# Altium PCB OK6010_DB.PcbDoc (part 1 of 4)
Units mil, origin at the board's own origin, x right, y up, seen from the top; angles counter-clockwise.
Board outline 4000 x 5500 mil, 4 copper layers (Top Layer, Ground Plane, Power Plane, Bottom Layer), stack 34.2 mil thick; 268 components, 248 nets, 1028 pads, 599 vias.
Unrouted connection lines stored in the file: 10.
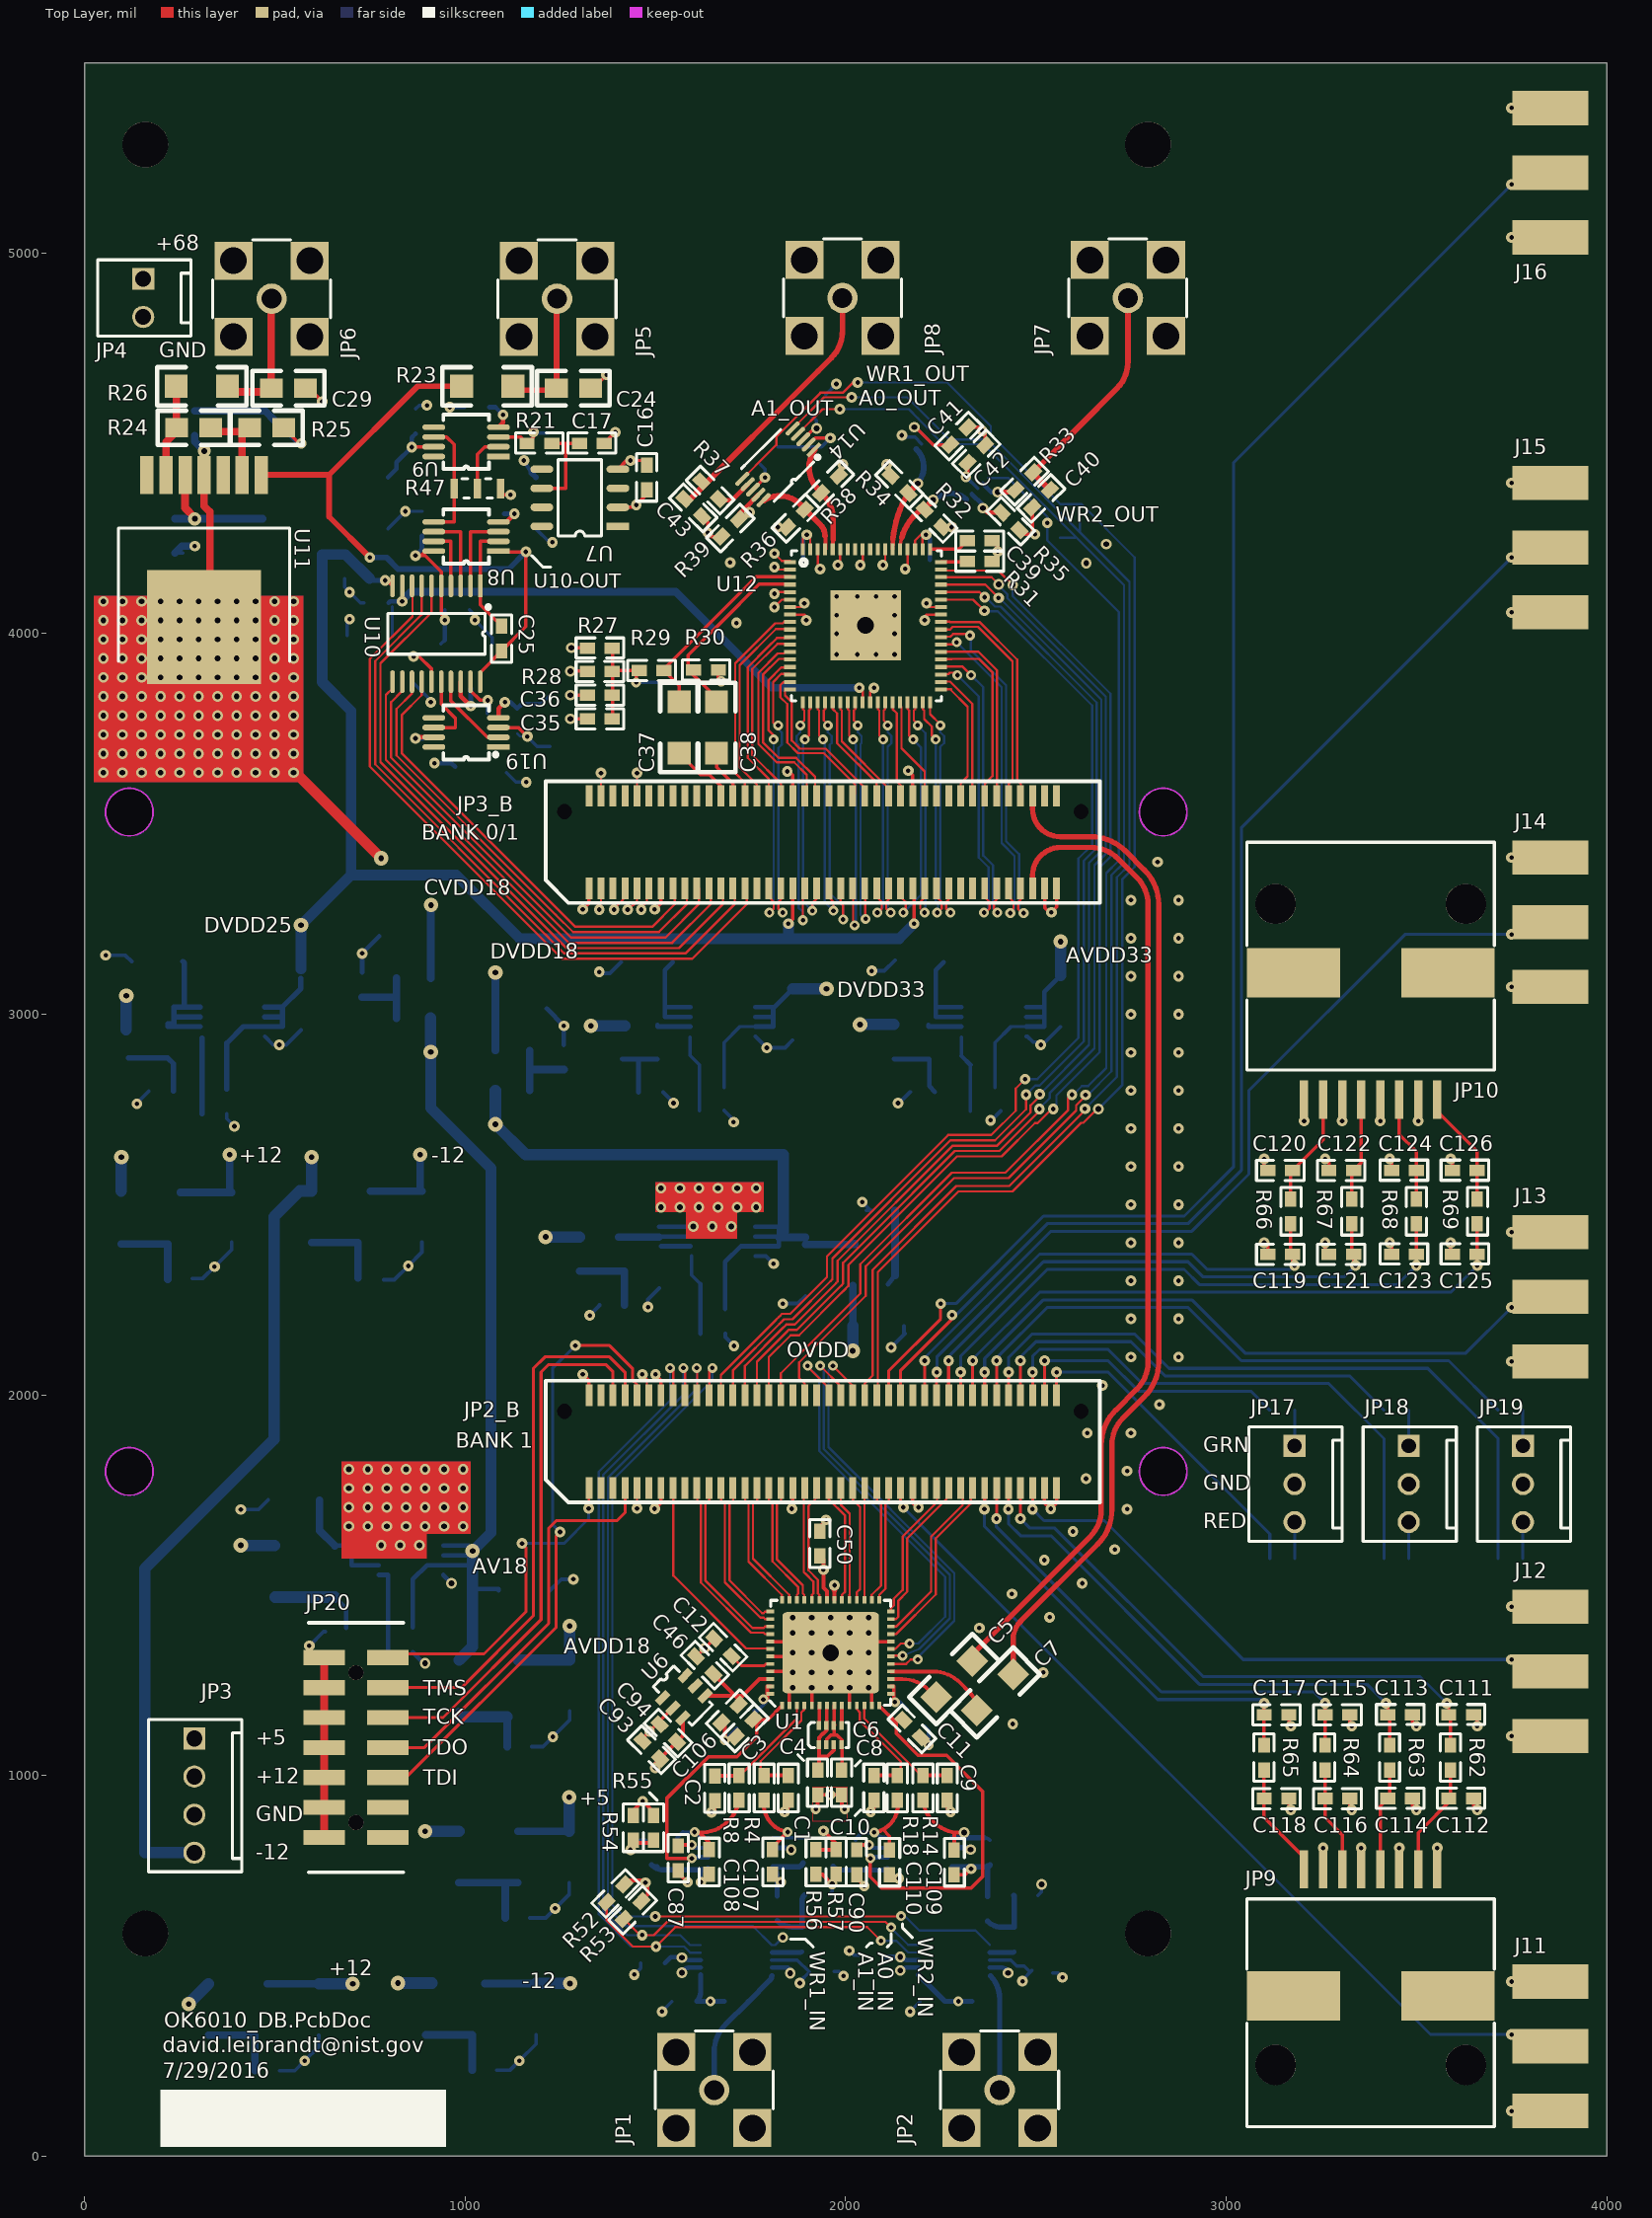
[diagram p0: Top Layer view]
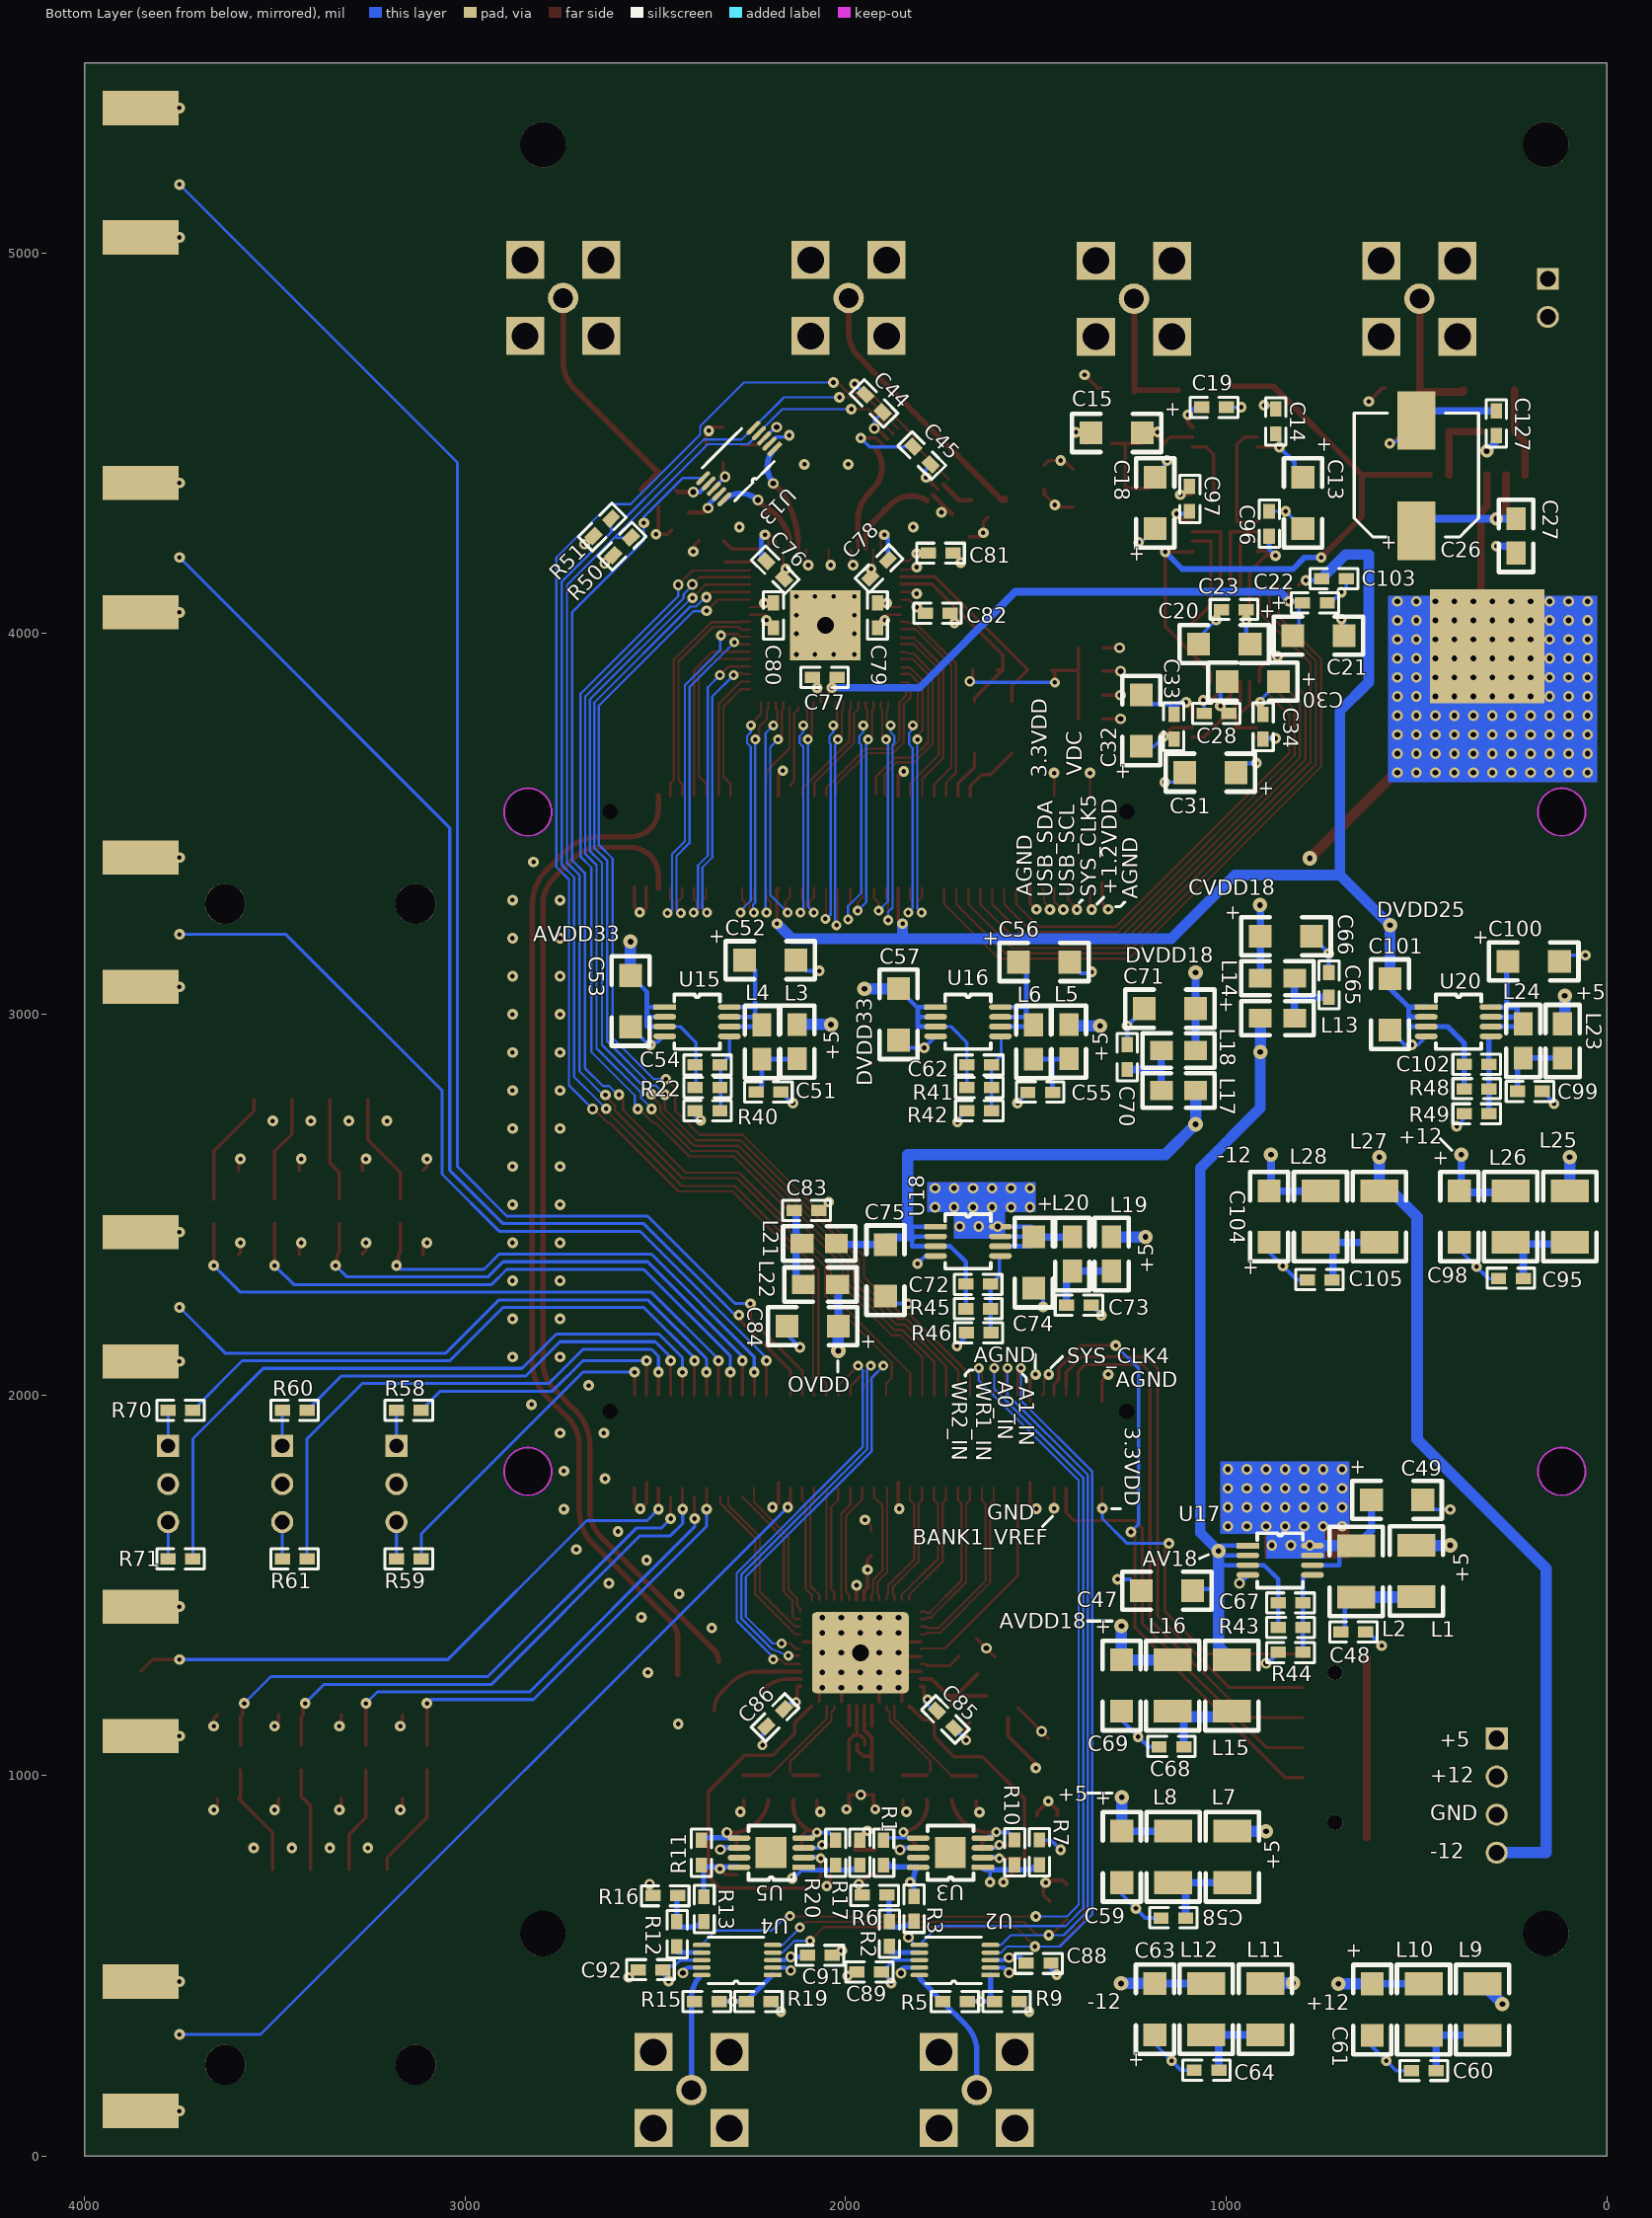
[diagram p1: Bottom Layer view, seen from below]
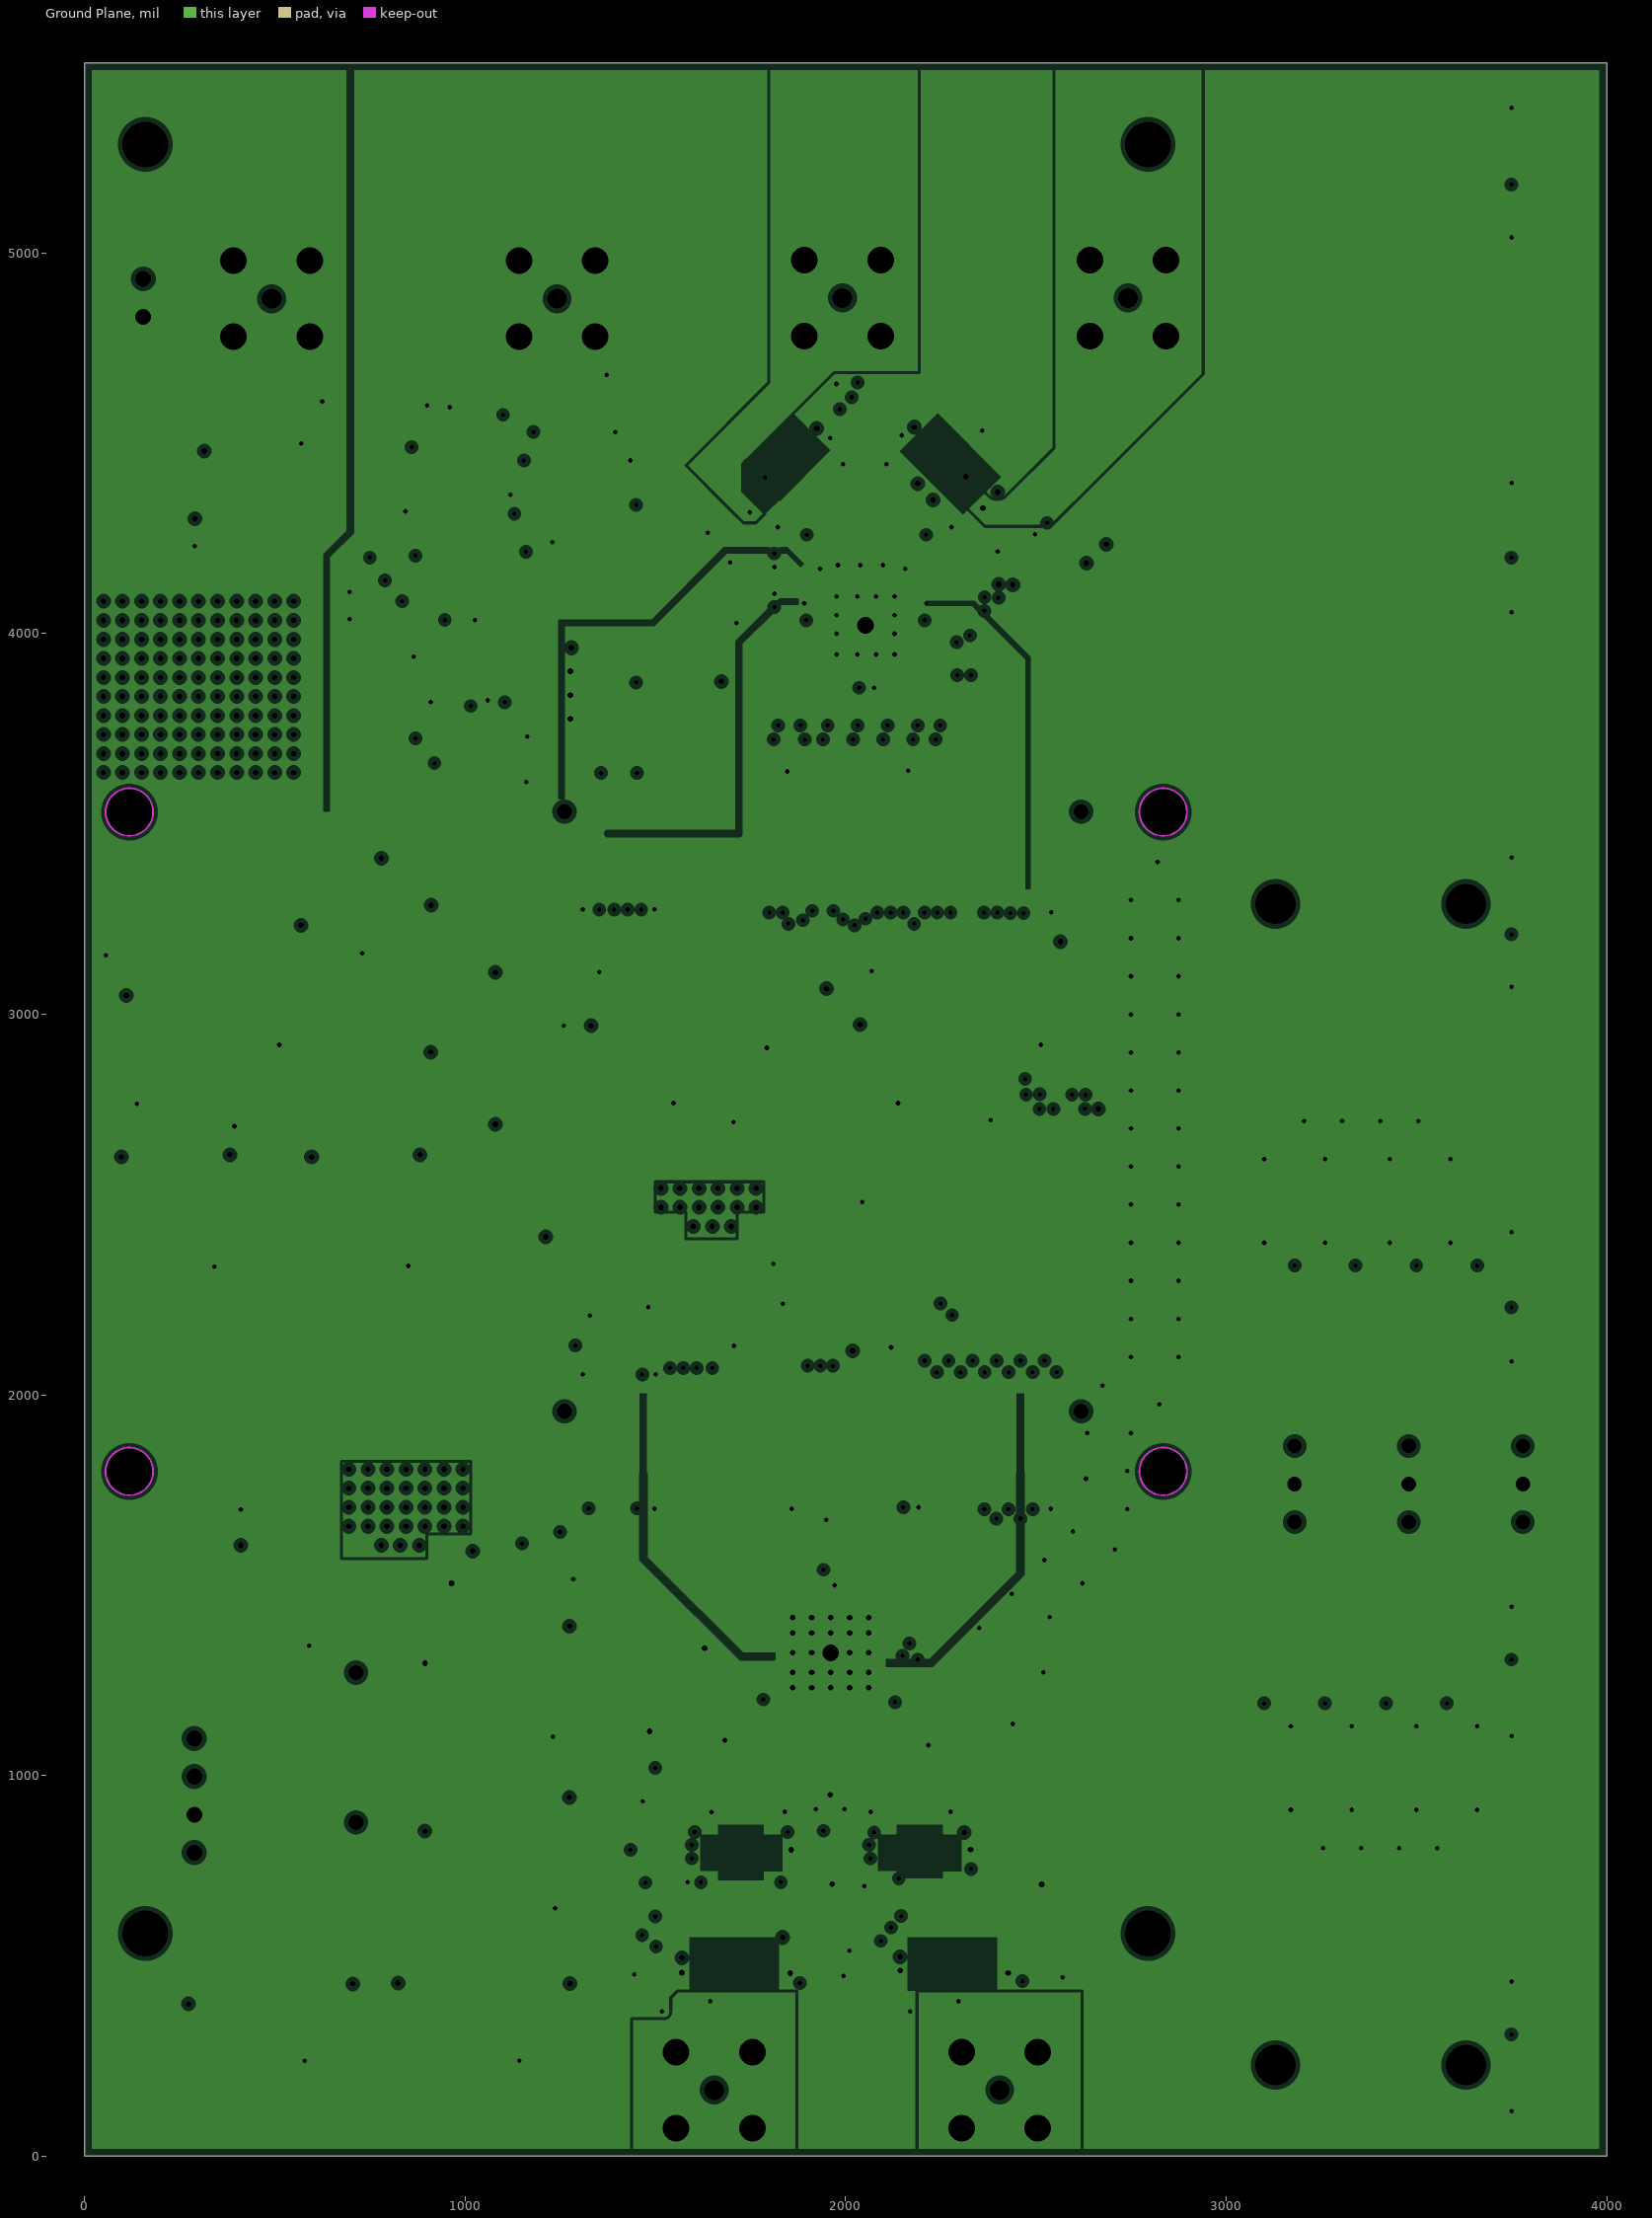
[diagram p2: Ground Plane, clearances drawn from the general rule]
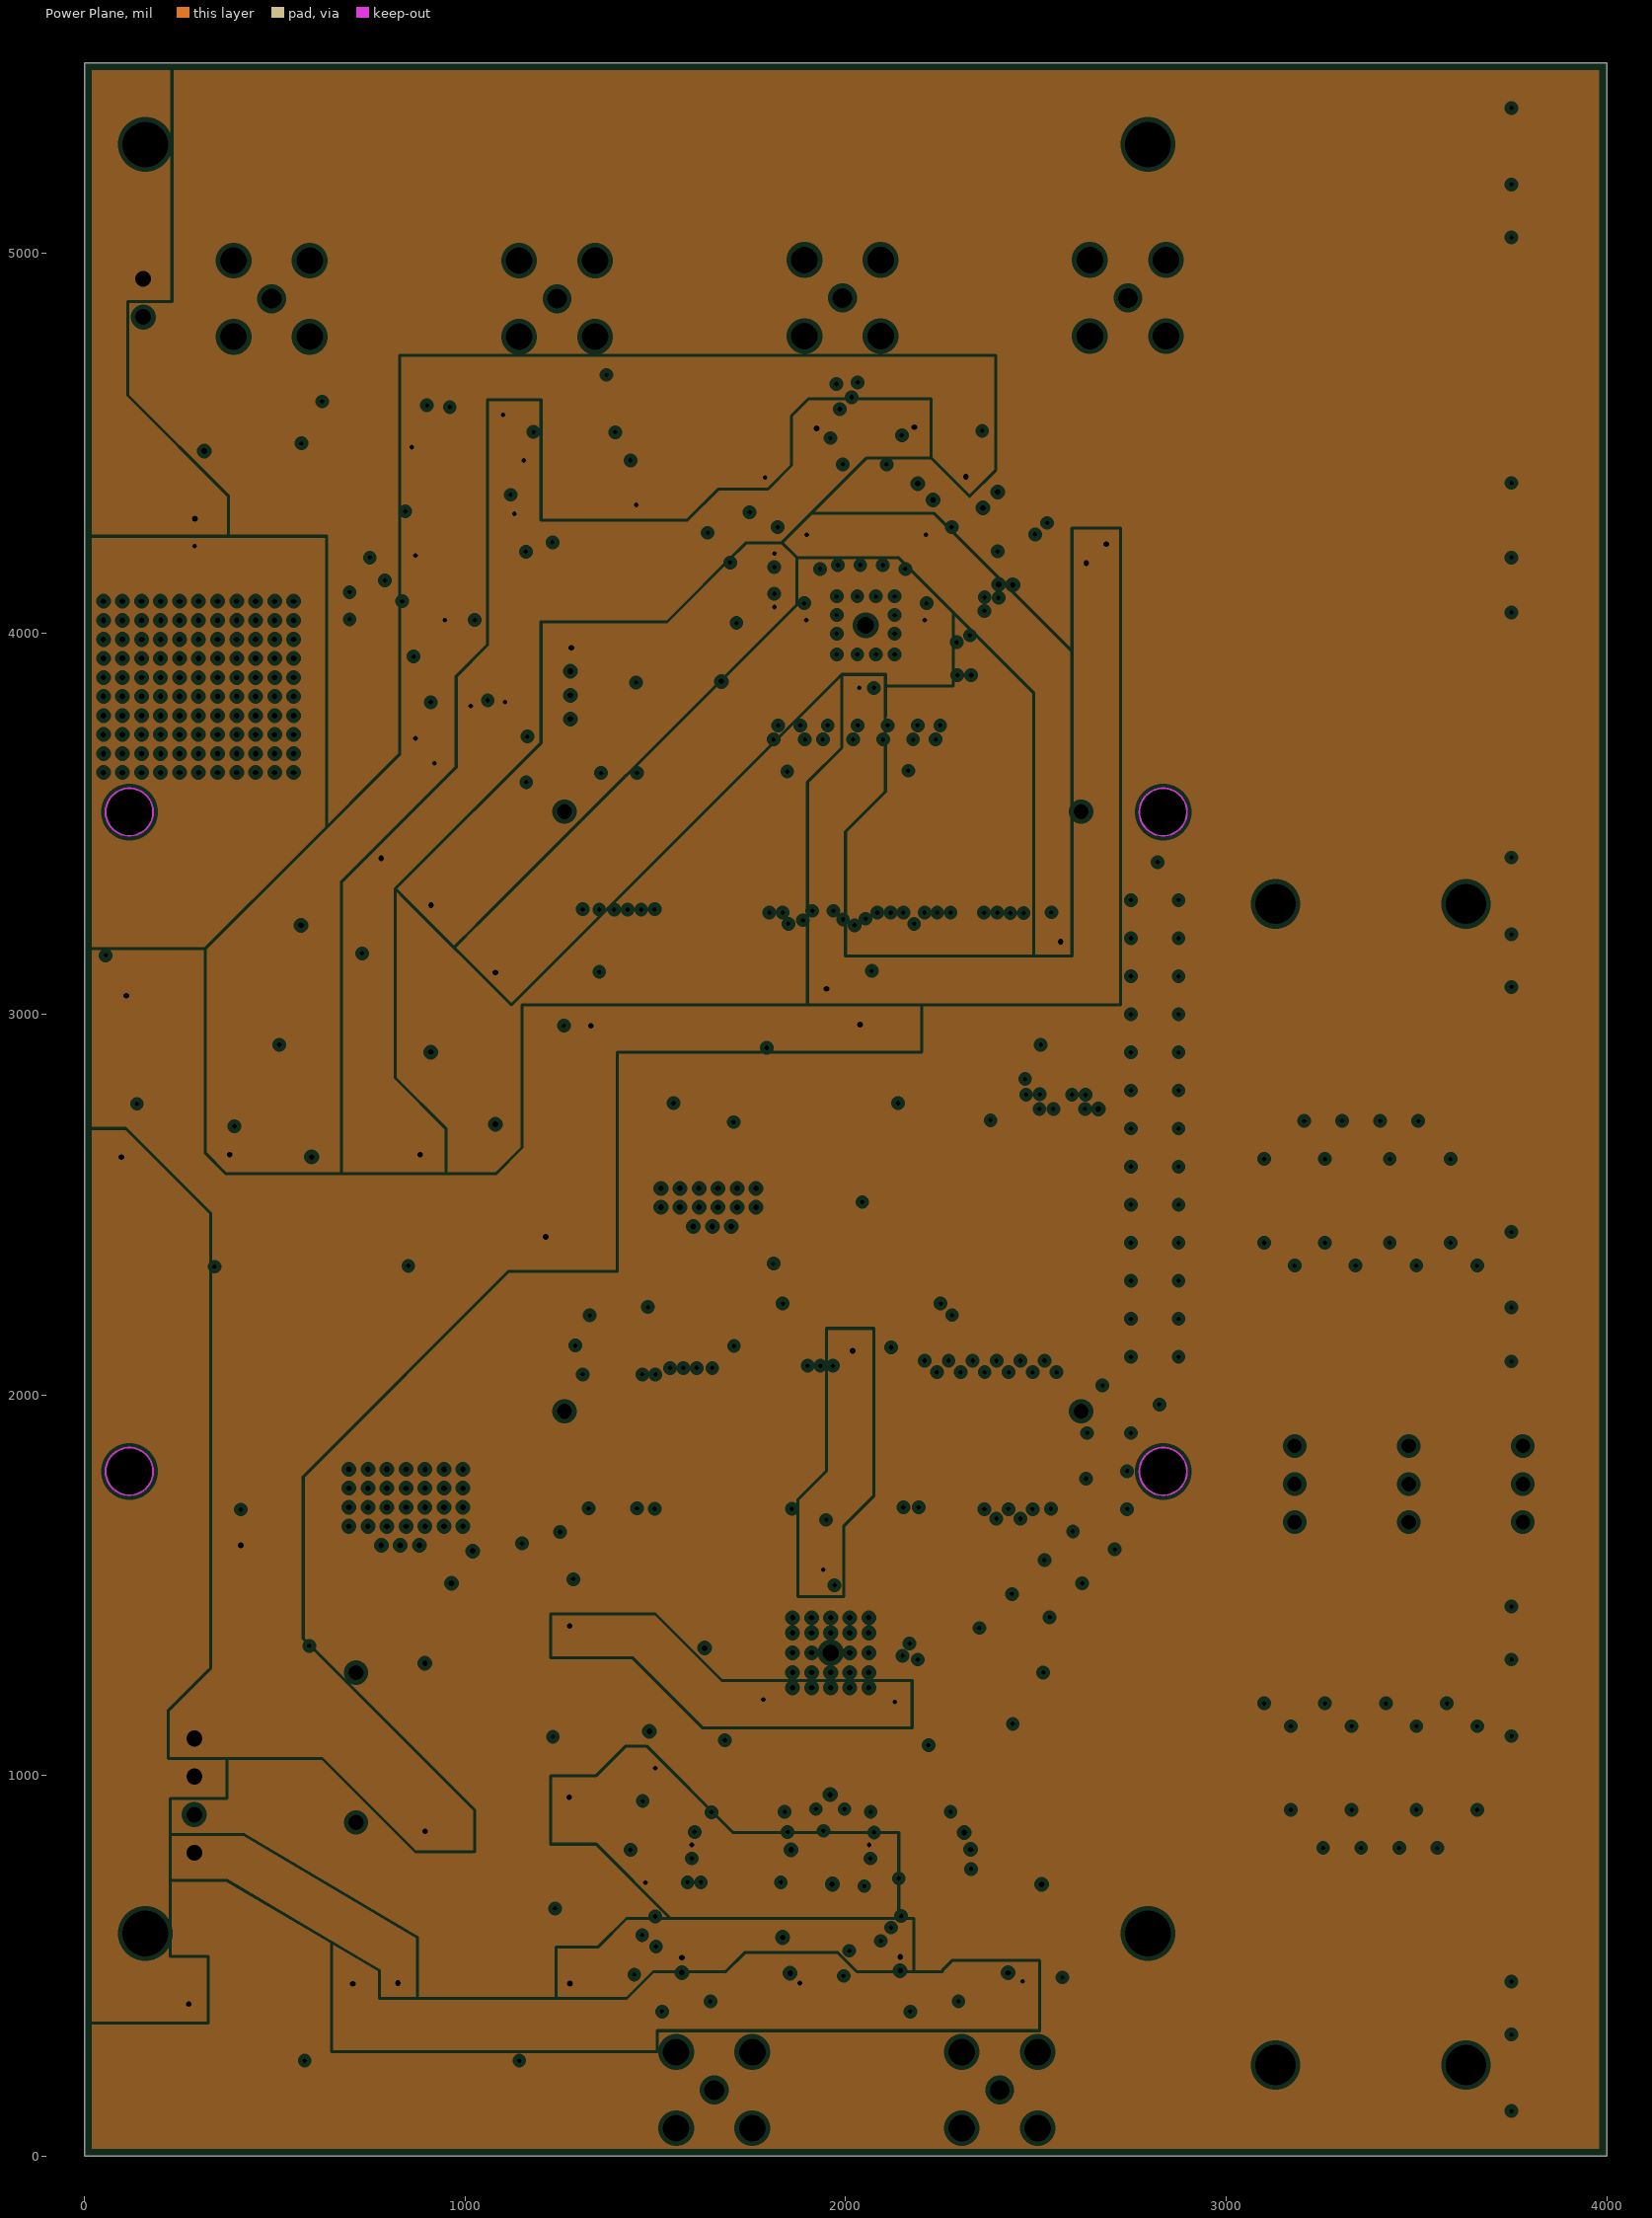
[diagram p3: Power Plane, clearances drawn from the general rule]

## Layer stack, top to bottom
Top Solder: solder mask 0.4, Solder Resist, Dk 3.5
Top Layer: signal copper 1.4
Dielectric1: core 8, FR-4, Dk 4.8
Ground Plane: plane copper 1.4
Dielectric2: prepreg 12.6, FR-4, Dk 4.8
Power Plane: plane copper 1.4
Dielectric3: core 8, FR-4, Dk 4.8
Bottom Layer: signal copper 1.4
Bottom Solder: solder mask 0.4, Solder Resist, Dk 3.5

## Board outline
0,0 4000,0 4000,5500 0,5500

## Design rules (kind name [scope] priority, off if disabled: settings)
Clearance Clearance_2 [InPolygon] p1: gap=16
Clearance [OnLayer('Ground Layer') vs OnLayer('Ground Layer')] p2: gap=16
Clearance Clearance_1 [All] p3: gap=6
DiffPairsRouting [All] p1: maxlimit=10 minlimit=6 mostfreqgap=6 toplayer_minwidth=15 toplayer_maxwidth=15 toplayer_prefwidth=15 bottomlayer_minwidth=15 bottomlayer_maxwidth=15 bottomlayer_prefwidth=15 maxuncoupledlength=500
HoleSize [All] p1: absolutevalues=TRUE maxlimit=250 minlimit=1 maxpercent=80.000 minpercent=20.000
MinimumSolderMaskSliver [All] p1: minsoldermaskwidth=0
PlaneClearance [All] p1: clearance=12
PlaneConnect [All] p1: planeconnectstyle=Direct reliefexpansion=14 reliefentries=4 reliefconductorwidth=10 reliefairgap=10
PolygonConnect PolygonConnect_2 [InNet('AGND')] p1: connectstyle=Direct reliefconductorwidth=10 reliefentries=4 polygonreliefangle="90 Angle" airgapwidth=10
PolygonConnect [OnLayer('Ground Layer') vs OnLayer('Ground Layer')] p2: connectstyle=Direct reliefconductorwidth=10 reliefentries=4 polygonreliefangle="90 Angle" airgapwidth=10
PolygonConnect PolygonConnect_1 [All] p3: connectstyle=Relief reliefconductorwidth=10 reliefentries=4 polygonreliefangle="90 Angle" airgapwidth=10
RoutingVias [All] p1: holewidth=12 width=28 viastyle="Through Hole" minholewidth=12 minwidth=28 maxholewidth=28 maxwidth=50
SilkToSilkClearance [All] p1: silktosilkclearance=0
SilkToSolderMaskClearance SilkscreenOverComponentPads [IsPad] p1: minsilkscreentomaskgap=1 clearancetoexposedcopper=TRUE
SolderMaskExpansion [All] p1: expansion=2
Width [All] p1: maxlimit=120 minlimit=6 preferedwidth=10 minimp=50.000000 maximp=50.000000 favimp=50.000000
23 further rules are at their usual default settings.

## Classes and differential pairs
component class OK6010_DB: C111 C112 C113 C114 C115 C116 C117 C118 C119 C120 C121 C122 C123 C124 C125 C126 J11 J12 J13 J14 J15 J16 JP2_B JP3_B JP9 JP10 JP17 JP18 JP19 JP20 R58 R59 R60 R61 R62 R63 R64 R65 R66 R67 R68 R69 R70 R71
component class OK6010_DB_PWR: C47 C48 C49 C51 C52 C53 C54 C55 C56 C57 C58 C59 C60 C61 C62 C63 C64 C65 C66 C67 C68 C69 C70 C71 C72 C73 C74 C75 C83 C84 C95 C98 C99 C100 C101 C102 C104 C105 JP3 JP4 L1 L2 L3 L4 L5 L6 L7 L8 L9 L10 L11 L12 L13 L14 L15 L16 L17 L18 L19 L20 L21 L22 L23 L24 L25 L26 L27 L28 R22 R40 R41 R42 R43 R44 R45 R46 R48 R49 U15 U16 U17 U18 U20
component class OK6010_DB_DAC_s: C13 C14 C15 C16 C17 C18 C19 C20 C21 C22 C23 C24 C25 C26 C27 C28 C29 C30 C31 C32 C33 C34 C96 C97 C103 C127 JP5 JP6 R21 R23 R24 R25 R26 R47 U7 U8 U9 U10 U11 U19
component class OK6010_DB_ADC: C1 C2 C3 C4 C5 C6 C7 C8 C9 C10 C11 C12 C46 C50 C85 C86 C87 C88 C89 C90 C91 C92 C93 C94 C106 C107 C108 C109 C110 JP1 JP2 R1 R2 R3 R4 R5 R6 R7 R8 R9 R10 R11 R12 R13 R14 R15 R16 R17 R18 R19 R20 R52 R53 R54 R55 R56 R57 U1 U2 U3 U4 U5 U6
component class OK6010_DB_DAC_f: C35 C36 C37 C38 C39 C40 C41 C42 C43 C44 C45 C76 C77 C78 C79 C80 C81 C82 JP7 JP8 R27 R28 R29 R30 R31 R32 R33 R34 R35 R36 R37 R38 R39 R50 R51 U12 U13 U14
differential pair L38_0: +L38_0_P -L38_0_N
differential pair A2: +A2_P -A2_N
differential pair A1: +A1_P -A1_N
differential pair L49_1: +L49_1_P -L49_1_N
differential pair L62_0: +L62_0_P -L62_0_N
differential pair L36_0: +L36_0_P -L36_0_N
differential pair L8_0: +L8_0_P -L8_0_N
differential pair L66_0: +L66_0_P -L66_0_N
differential pair L65_0: +L65_0_P -L65_0_N
differential pair L64_0: +L64_0_P -L64_0_N
differential pair L63_0: +L63_0_P -L63_0_N
differential pair L60_1: +L60_1_P -L60_1_N
differential pair L58_1: +L58_1_P -L58_1_N
differential pair L51_1: +L51_1_P -L51_1_N
differential pair L51_0: +L51_0_P -L51_0_N
differential pair L50_0: +L50_0_P -L50_0_N
differential pair L49_0: +L49_0_P -L49_0_N
differential pair L47_1: +L47_1_P -L47_1_N
differential pair L44_1: +L44_1_P -L44_1_N
differential pair L39_1: +L39_1_P -L39_1_N
differential pair L38_1: +L38_1_P -L38_1_N
differential pair L33_0: +L33_0_P -L33_0_N
differential pair L32_0: +L32_0_P -L32_0_N
differential pair L30_1: +L30_1_P -L30_1_N
differential pair L29_1: +L29_1_P -L29_1_N
differential pair L7_0: +L7_0_P -L7_0_N
differential pair L6_0: +L6_0_P -L6_0_N
differential pair L5_0: +L5_0_P -L5_0_N
differential pair L4_0: +L4_0_P -L4_0_N
differential pair L3_0: +L3_0_P -L3_0_N
differential pair L2_0: +L2_0_P -L2_0_N
differential pair L60A_1: +L60A_1_P -L60A_1_N
differential pair L40_1: +L40_1_P -L40_1_N
differential pair L1_0: +L1_0_P -L1_0_N

## Components (designator, comment, footprint, x,y, rotation, side; value= is the part's Value field where it differs from the comment)
C1 "300pF" 0603w 1849,935 r90 top
C2 "300pF" 0603w 1657,999 r270 top
C3 "0.1uF" 0603w 1758,1148 r225 top
C4 "0.1uF" 0603w 1927,1014 r270 top
C5 "0.1uF" 1206 2238,1206 r45 top
C6 "2.2uF" "0805 CLL" 1930,1081 r90 top locked
C7 "0.1uF" 1206 2345,1171 r45 top
C8 "0.1uF" 0603w 1990,1014 r270 top
C9 "300pF" 0603w 2267,935 r90 top
C10 "300pF" 0603w 2075,1000 r270 top
C11 "0.1uF" 0603w 2152,1146 r315 top
C12 "2.2uF" 0603w 1701,1314 r135 top
C13 "10uF" 1206 798,4411 r270 bottom
C14 "0.1uF" 0603w 870,4525 r90 bottom
C15 "10uF" 1206 1219.87,4527.21 r0 bottom
C16 "0.1uF" 0603w 1478,4443 r270 top
C17 "0.1uF" 0603w 1366,4500.31 r180 top
C18 "10uF" 1206 1186,4276 r90 bottom
C19 "0.1uF" 0603w 1064,4595 r180 bottom
C20 "10uF" 1206 937,3973 r0 bottom
C21 "10uF" 1206 825,3995 r180 bottom
C22 "0.1uF" 0603w 799,4081 r180 bottom
C23 "0.1uF" 0603w 947,4063 r0 bottom
C24 "33nF" 0805 1330,4645 r180 top
C25 "10pF" 0603w 1096.12,3954.55 r90 top
C26 "10uF" "7243 V TYPE HD" 500,4270 r90 bottom
C27 "0.1uF" 0805 238,4302 r270 bottom
C28 "0.1uF" 0603w 993,3790 r0 bottom
C29 "33nF" 0805 581,4645 r180 top
C30 "10uF" 1206 862,3874 r0 bottom
C31 "10uF" 1206 974,3635 r0 bottom
C32 "10uF" 1206 1223,3704 r90 bottom
C33 "0.1uF" 0603w 1137,3788 r270 bottom
C34 "0.1uF" 0603w 903,3723 r90 bottom
C35 "0.1uF" 0603w 1387,3776 r180 top
C36 "1nF" 0603w 1387,3838 r180 top
C37 "0.1uF" 1206 1563,3686 r90 top
C38 "0.1uF" 1206 1661,3686 r90 top
C39 "0.1uF" 0603w 2320,4244 r0 top
C40 "300pF" 0603w 2537,4378 r225 top
C41 "0.1uF" 0603w 2321,4542 r225 top
C42 "0.1uF" 0603w 2367,4495 r225 top
C43 "300pF" 0603w 1577,4354 r315 top
C44 "0.1uF" 0603w 1948,4628 r225 bottom
C45 "0.1uF" 0603w 1822,4491 r225 bottom
C46 "10uF" 0603w 1653,1267 r135 top
C47 "100uF" 1206 1088,1486 r0 bottom
C48 "0.1uF" 0603w 698,1378 r180 bottom
C49 "10uF" 1206 618,1724 r180 bottom
C50 "0.1uF" 0603w 1933,1642 r270 top
C51 "0.1uF" 0603w 2235,2796.2 r180 bottom
C52 "10uF" 1206 2265,3142.2 r180 bottom
C53 "100uF" 1206 2565,3102.2 r270 bottom
C54 "100pF" 0603w 2395,2867.2 r180 bottom
C55 "0.1uF" 0603w 1456,2795.2 r0 bottom
C56 "10uF" 1206 1546,3137.2 r180 bottom
C57 "100uF" 1206 1861,3067.2 r270 bottom
C58 "0.1uF" 0603w 1106,626 r0 bottom
C59 "10uF" 1206 1274,854 r270 bottom
C60 "0.1uF" 0603w 448,225 r0 bottom
C61 "10uF" 1206 616,453 r270 bottom
C62 "100pF" 0603w 1681,2867.2 r180 bottom
C63 "10uF" 1206 1187,319 r90 bottom
C64 "0.1uF" 0603w 1019,226 r0 bottom
C65 "0.1uF" 0603w 730,3045 r90 bottom
C66 "10uF" 1206 910,3205 r180 bottom
C67 "100pF" 0603w 863,1454 r180 bottom
C68 "0.1uF" 0603w 1111,1076 r0 bottom
C69 "10uF" 1206 1275,1304 r270 bottom
C70 "0.1uF" 0603w 1260,2855 r90 bottom
C71 "10uF" 1206 1080,3015 r0 bottom
C72 "100pF" 0603w 1684,2291.2 r180 bottom
C73 "0.1uF" 0603w 1419,2236.2 r180 bottom
C74 "10uF" 1206 1505,2415.2 r270 bottom
C75 "100uF" 1206 1895,2395.2 r270 bottom
C76 "0.1uF" 0603w 2161.9,4144.49 r45 bottom
C77 "0.1uF" 0603w 2022.49,3885.1 r0 bottom
C78 "0.1uF" 0603w 1888.51,4193.9 r315 bottom
C79 "0.1uF" 0603w 1915.9,4080.51 r270 bottom
C80 "0.1uF" 0603w 2189.1,4080.51 r270 bottom
C81 "1nF" 0603w 1782.51,4211.9 r180 bottom
C82 "1nF" 0603w 1790.51,4053.9 r180 bottom
C83 "0.1uF" 0603w 2135,2485 r180 bottom
C84 "10uF" 1206 2019,2181 r0 bottom
C85 "0.1uF" 0603w 1759.93,1170.73 r225 bottom
C86 "0.1uF" 0603w 2161.73,1175.07 r315 bottom
C87 "0.1uF" 0603w 1560.54,815.56 r270 top
C88 "0.1uF" 0603w 1525.07,507.27 r180 bottom
C89 "0.1uF" 0603w 1904.93,483.73 r0 bottom
C90 "0.1uF" 0603w 2029.27,805.07 r270 top
C91 "0.1uF" 0603w 2100.07,528.27 r180 bottom
C92 "0.1uF" 0603w 2479.93,489.73 r0 bottom
C93 "10uF" 0603w 1512.73,1044.93 r135 top
C94 "0.1uF" 0603w 1511.27,1135.07 r315 top
C95 "0.1uF" 0603w 219,2306.1 r0 bottom
C96 "0.1uF" 0603w 886.9,4256.49 r90 bottom
C97 "0.1uF" 0603w 1095.9,4321.49 r90 bottom
C98 "10uF" 1206 387,2536.1 r270 bottom
C99 "0.1uF" 0603w 234,2798 r180 bottom
C100 "10uF" 1206 259,3139 r180 bottom
C101 "100uF" 1206 569,3094 r270 bottom
C102 "100pF" 0603w 374,2869 r180 bottom
C103 "0.1uF" 0603w 749,4145 r180 bottom
C104 "10uF" 1206 887,2401.1 r90 bottom
C105 "0.1uF" 0603w 722,2302.49 r0 bottom
C106 "0.1uF" 0603w 1673.49,1139.9 r45 top
C107 "1.8pF" 0603w 1808.49,740.49 r90 top
C108 "1.8pF" 0603w 1641.49,740.49 r90 top
C109 "1.8pF" 0603w 2285.49,739.9 r90 top
C110 "1.8pF" 0603w 2115.49,739.9 r90 top
C111 "NS" 0603w 3650,1160 r180 top
C112 "NS" 0603w 3650,940 r180 top
C113 "NS" 0603w 3490,1160 r180 top
C114 "NS" 0603w 3490,940 r180 top
C115 "NS" 0603w 3260,1160 r0 top
C116 "NS" 0603w 3260,940 r0 top
C117 "NS" 0603w 3100,1160 r0 top
C118 "NS" 0603w 3100,940 r0 top
C119 "NS" 0603w 3110,2370 r0 top
C120 "NS" 0603w 3110,2590 r0 top
C121 "NS" 0603w 3270,2370 r0 top
C122 "NS" 0603w 3270,2590 r0 top
C123 "NS" 0603w 3500,2370 r180 top
C124 "NS" 0603w 3500,2590 r180 top
C125 "NS" 0603w 3660,2370 r180 top
C126 "NS" 0603w 3660,2590 r180 top
C127 "0.1uF" 0603w 290,4520 r90 bottom
J11 "SMA_EDGE" sma_edge 3852,289 r0 top
J12 "SMA_EDGE" sma_edge 3852,1274 r0 top
J13 "SMA_EDGE" sma_edge 3852,2258 r0 top
J14 "SMA_EDGE" sma_edge 3852,3242 r0 top
J15 "SMA_EDGE" sma_edge 3852,4226 r0 top
J16 "SMA_EDGE" sma_edge 3852,5211 r0 top
JP1 "SMA" sma_pcb_200 1555,74 r90 top
JP2 "SMA" sma_pcb_200 2305,74 r90 top
JP2_B "BTE-040-01-F-D-A" BTE-040-01-F-D-A 1326,1999 r0 top locked
JP3 "SIP4 (PCB TERMINAL)" SIP4MOLEX 288.9,1097.51 r270 top
JP3_B "BTE-040-01-F-D-A" BTE-040-01-F-D-A 1326,3574 r0 top locked
JP4 "SIP2 (PCB TERMINAL)" SIP2MOLEX 154.51,4932.1 r270 top
JP5 "SMA" sma_pcb_200 1142,4780 r90 top
JP6 "SMA" sma_pcb_200 392,4780 r90 top
JP7 "SMA" sma_pcb_200 2642,4782 r90 top
JP8 "SMA" sma_pcb_200 1892,4782 r90 top
JP9 "RJ-45" SMD_ETHERNET 3630,240 r270 top
JP10 "RJ-45" SMD_ETHERNET 3130,3290 r90 top
JP17 "SIP3 (PCB TERMINAL)" SIP3MOLEX 3180,1866 r270 top
JP18 "SIP3 (PCB TERMINAL)" SIP3MOLEX 3480,1866 r270 top
JP19 "SIP3 (PCB TERMINAL)" SIP3MOLEX 3780,1866 r270 top
JP20 "HEADER 7X2" "IDC14 SM 2MM" 630,1310 r0 top
L1 "1.0uH" 1210 500,1605 r270 bottom
L2 "1.0uH" 1210 658,1469 r90 bottom
L3 "1.0uH" 0805 2127,2973.2 r270 bottom
L4 "1.0uH" 0805 2220,2882.2 r90 bottom
L5 "1.0uH" 0805 1413,2973.2 r270 bottom
L6 "1.0uH" 0805 1506,2882.2 r90 bottom
L7 "1.0uH" 1210 984,854 r270 bottom
L8 "1.0uH" 1210 1139,719 r90 bottom
L9 "1.0uH" 1210 326,453 r270 bottom
L10 "1.0uH" 1210 481,318 r90 bottom
L11 "1.0uH" 1210 897,454 r270 bottom
L12 "1.0uH" 1210 1052,319 r90 bottom
L13 "1.0uH" 0805 910,2990 r180 bottom
L14 "1.0uH" 0805 820,3095 r0 bottom
L15 "1.0uH" 1210 985,1304 r270 bottom
L16 "1.0uH" 1210 1140,1169 r90 bottom
L17 "1.0uH" 0805 1080,2800 r0 bottom
L18 "1.0uH" 0805 1170,2905 r180 bottom
L19 "1.0uH" 0805 1301,2415.2 r270 bottom
L20 "1.0uH" 0805 1404,2325.2 r90 bottom
L21 "1.0uH" 0805 2024,2398 r0 bottom
L22 "1.0uH" 0805 2111,2290 r180 bottom
L23 "1.0uH" 0805 116,2975 r270 bottom
L24 "1.0uH" 0805 219,2885 r90 bottom
L25 "1.0uH" 1210 97,2536.1 r270 bottom
L26 "1.0uH" 1210 252,2401.1 r90 bottom
L27 "1.0uH" 1210 597,2536.1 r270 bottom
L28 "1.0uH" 1210 752,2401.1 r90 bottom
R1 "249*" 0603w 1900,765 r90 bottom
R2 "150*" 0603w 1885,552 r90 bottom
R3 "220*" 0603w 1820,618 r90 bottom
R4 "49.9*" 0603w 1786,935 r90 top
R5 "100k" 0603w 1680,406 r0 bottom
R6 "49.9*" 0603w 1956,686 r180 bottom
R7 "220*" 0603w 1490,831 r270 bottom
R8 "49.9*" 0603w 1720,935 r90 top
R9 "1M" 0603w 1544,406 r0 bottom
R10 "249*" 0603w 1556,766 r90 bottom
R11 "249*" 0603w 2379,765 r90 bottom
R12 "150*" 0603w 2443,551 r90 bottom
R13 "220*" 0603w 2372,617 r90 bottom
R14 "49.9*" 0603w 2203,935 r90 top
R15 "100k" 0603w 2332,406 r0 bottom
R16 "49.9*" 0603w 2506,685 r180 bottom
R17 "220*" 0603w 1962,830 r270 bottom
R18 "49.9*" 0603w 2136,935 r90 top
R19 "1M" 0603w 2196,406 r0 bottom
R20 "249*" 0603w 2026,765 r90 bottom
R21 "1.5k" 0603w 1228.02,4500.31 r180 top
R22 "140k" 0603w 2330,2807.2 r0 bottom
R23 "49.9*" 1206 991,4650 r0 top
R24 "9k *" 0805 332,4541 r180 top
R25 "1k *" 0805 524,4541 r180 top
R26 "49.9*" 1206 241,4650 r0 top
R27 "1K" 0603w 1387,3962 r180 top
R28 "287" 0603w 1322,3901 r0 top
R29 "49.9*" 0603w 1523,3903 r180 top
R30 "49.9*" 0603w 1601,3905 r0 top
R31 "10k*" 0603w 2385,4190 r180 top
R32 "49.9*" 0603w 2208,4326 r315 top
R33 "49.9*" 0603w 2447,4378 r45 top
R34 "49.9*" 0603w 2119,4415 r315 top
R35 "0" 0603w 2457,4272 r135 top
R36 "49.9*" 0603w 1893,4326 r225 top
R37 "49.9*" 0603w 1667,4354 r135 top
R38 "49.9*" 0603w 1982,4415 r225 top
R39 "0" 0603w 1674,4255 r45 top
R40 "78.7k" 0603w 2395,2747.2 r180 bottom
R41 "140k" 0603w 1616,2807.2 r0 bottom
R42 "78.7k" 0603w 1681,2747.2 r180 bottom
R43 "76.8k" 0603w 798,1389 r0 bottom
R44 "147k" 0603w 863,1324 r180 bottom
R45 "76.8k" 0603w 1619,2226.2 r0 bottom
R46 "147k" 0603w 1682.51,2163.9 r180 bottom
R47 "10k" VFCD1505 1093.58,4381.68 r180 top
R48 "107k" 0603w 309,2804 r0 bottom
R49 "93.1K" 0603w 374,2739 r180 bottom
R50 "2k" 0603w 2563.9,4252.49 r315 bottom
R51 "2k" 0603w 2616.1,4302.51 r315 bottom
R52 "2k" 0603w 1372.49,667.9 r45 top
R53 "2k" 0603w 1417.49,623.9 r45 top
R54 "75*" 0603w 1442.9,895.51 r270 top
R55 "75*" 0603w 1495.9,895.51 r270 top
R56 "75*" 0603w 1922.1,740.49 r90 top
R57 "75*" 0603w 1975.1,740.49 r90 top
R58 "65" 0603w 3180,1960 r180 bottom
R59 "65" 0603w 3180,1570 r180 bottom
R60 "65" 0603w 3480,1960 r180 bottom
R61 "65" 0603w 3480,1570 r180 bottom
R62 "0" 0603w 3590,1080 r270 top
R63 "0" 0603w 3430,1080 r270 top
R64 "0" 0603w 3260,1080 r270 top
R65 "0" 0603w 3100,1080 r270 top
R66 "0" 0603w 3170,2450 r90 top
R67 "0" 0603w 3330,2450 r90 top
R68 "0" 0603w 3500,2450 r90 top
R69 "0" 0603w 3660,2450 r90 top
R70 "65" 0603w 3780,1960 r180 bottom
R71 "65" 0603w 3780,1570 r180 bottom
U1 "LTC2195" "UKG - QFN52" 1833,1184 r90 top
U2 "AD8251" MSOP10sm 1619,476 r0 bottom
U3 "LTC6406" MSOP08 1639,759 r0 bottom
U4 "AD8251" MSOP10sm 2191,476 r0 bottom
U5 "LTC6406" MSOP08 2110,759 r0 bottom
U6 "ADR127" TSOT-6 1520,1204 r45 top
U7 "ADR445B" SOIC08 1402,4282 r180 top
U8 "AD8676" MSOP08 1088.05,4216.94 r180 top
U9 "AD8675" MSOP08 1088.05,4465.5 r180 top
U10 "AD5791" TSSOP20 1039.98,4125.69 r270 top
U11 "OPA453" DDPAK-7 464.51,4417.1 r270 top
U12 "AD9783" LFCSP72 1854,4188 r0 top locked
U13 "AD8251" MSOP10sm 2186,4485 r315 bottom
U14 "AD8251" MSOP10sm 1917,4483 r225 top locked
U15 "ADP3336" MSOP08 2475,3019 r180 bottom
U16 "ADP3336" MSOP08 1763,3019 r180 bottom
U17 "ADP3336" MSOP08 943,1604 r180 bottom
U18 "ADP3336" MSOP08 1763,2442 r180 bottom
U19 "AD8675" MSOP08 1088.05,3702.29 r180 top
U20 "ADP3336" MSOP08 474,3019 r180 bottom

## Footprints (in the part's own frame and the unit in brackets; to place one, negate y for a bottom-side part, rotate by r counter-clockwise, add the part's x,y. Pads: shape width x height; smd on the part's side, far side on the other; paste and mask are expansions set on the pad)
0603w [mil]
  rect 40x30 smd: 1(0,0) 2(65,0)
  silkscreen extent -30,-27 95,26
0805 [mil]
  rect 60x50 smd: 1(0,0) 2(90,0)
  silkscreen extent -50,-45 140,45
"0805 CLL" [mm] "Interdigitated Capacitor"
  rect 0.6x0.3 smd: 1(0,0) 2(0,-0.5) 3(0,-1) 4(0,-1.5) 5(1.3,-1.5) 6(1.3,-1) 7(1.3,-0.5) 8(1.3,0)
  silkscreen extent -0.2,-2 1.5,0.7
1206 [mil]
  rect 60x60 smd: 1(0,0) 2(135,0)
  silkscreen extent -50,-50 185,50
1210 [mil]
  rect 60x100 smd: 1(0,0) 2(135,0)
  silkscreen extent -50,-70 185,70
"7243 V TYPE HD" [mil] "Aluminum Electrolytic Surface Mount"
  rect 154x100 smd: 1(0,0) 2(290,0)
  silkscreen extent -16,-163 309,163
BTE-040-01-F-D-A [mil] "Samtec Surface Mount Micro Terminal Strip"
  rect 18x57 smd mask+3: 1(0,0) 2(0,-243) 3(31.5,0) 4(31.5,-243) 5(63,0) 6(63,-243) 7(94.5,0) 8(94.5,-243) 9(126,0) 10(126,-243) 11(157.5,0) 12(157.5,-243) 13(189,0) 14(189,-243) 15(220.5,0) 16(220.5,-243) 17(252,0) 18(252,-243) 19(283.5,0) 20(283.5,-243) 21(315,0) 22(315,-243) 23(346.5,0) 24(346.5,-243) 25(378,0) 26(378,-243) 27(409.5,0) 28(409.5,-243) 29(441,0) 30(441,-243) 31(472.5,0) 32(472.5,-243) 33(504,0) 34(504,-243) 35(535.5,0) 36(535.5,-243) 37(567,0) 38(567,-243) 39(598.5,0) 40(598.5,-243) 41(630,0) 42(630,-243) 43(661.5,0) 44(661.5,-243) 45(693,0) 46(693,-243) 47(724.5,0) 48(724.5,-243) 49(756,0) 50(756,-243) 51(787.5,0) 52(787.5,-243) 53(819,0) 54(819,-243) 55(850.5,0) 56(850.5,-243) 57(882,0) 58(882,-243) 59(913.5,0) 60(913.5,-243) 61(945,0) 62(945,-243) 63(976.5,0) 64(976.5,-243) 65(1008,0) 66(1008,-243) 67(1039.5,0) 68(1039.5,-243) 69(1071,0) 70(1071,-243) 71(1102.5,0) 72(1102.5,-243) 73(1134,0) 74(1134,-243) 75(1165.5,0) 76(1165.5,-243) 77(1197,0) 78(1197,-243) 79(1228.5,0) 80(1228.5,-243)
  round 20 hole 40 unplated mask+20: 161(-64.5,-41.5) 162(1293,-41.5)
  silkscreen extent -114,-282 1342,38
DDPAK-7 [mil]
  rect 100x35 smd: 1(0,0) 2(0,-50) 3(0,-100) 4(0,-150) 5(0,-200) 6(0,-250) 7(0,-300)
  rect 300x300 smd: 4(400,-150)
  silkscreen extent 140,-375 490,75
"IDC14 SM 2MM" [mm] "MOLEX 87832-1420"
  rect 2.75x1 smd: 1(0,0) 2(4.25,0) 3(0,-2) 4(4.25,-2) 5(0,-4) 6(4.25,-4) 7(0,-6) 8(4.25,-6) 9(0,-8) 10(4.25,-8) 11(0,-10) 12(4.25,-10) 13(0,-12) 14(4.25,-12)
  round 1.016 hole 1.016: ""(2.125,-11) ""(2.125,-1)
  silkscreen extent -1.02,-14.33 5.28,2.32
LFCSP72 [mm]
  rect 0.8x0.27 smd: 1(0,0) 2(0,-0.5) 3(0,-1) 4(0,-1.5) 5(0,-2) 6(0,-2.5) 7(0,-3) 8(0,-3.5) 9(0,-4) 10(0,-4.5) 11(0,-5) 12(0,-5.5) 13(0,-6) 14(0,-6.5) 15(0,-7) 16(0,-7.5) 17(0,-8) 18(0,-8.5) 37(10.077,-8.5) 38(10.077,-8) 39(10.077,-7.5) 40(10.077,-7) 41(10.077,-6.5) 42(10.077,-6) 43(10.077,-5.5) 44(10.077,-5) 45(10.077,-4.5) 46(10.077,-4) 47(10.077,-3.5) 48(10.077,-3) 49(10.077,-2.5) 50(10.077,-2) 51(10.077,-1.5) 52(10.077,-1) 53(10.077,-0.5) 54(10.077,0)
  rect 0.27x0.8 smd: 19(0.852,-9.352) 20(1.352,-9.352) 21(1.852,-9.352) 22(2.352,-9.352) 23(2.852,-9.352) 24(3.352,-9.352) 25(3.852,-9.352) 26(4.352,-9.352) 27(4.852,-9.352) 28(5.352,-9.352) 29(5.852,-9.352) 30(6.352,-9.352) 31(6.852,-9.352) 32(7.352,-9.352) 33(7.852,-9.352) 34(8.352,-9.352) 35(8.852,-9.352) 36(9.352,-9.352) 55(9.352,0.852) 56(8.852,0.852) 57(8.352,0.852) 58(7.852,0.852) 59(7.352,0.852) 60(6.852,0.852) 61(6.352,0.852) 62(5.852,0.852) 63(5.352,0.852) 64(4.852,0.852) 65(4.352,0.852) 66(3.852,0.852) 67(3.352,0.852) 68(2.852,0.852) 69(2.352,0.852) 70(1.852,0.852) 71(1.352,0.852) 72(0.852,0.852)
  silkscreen extent 0.1,-9.25 10.1,0.75
MSOP08 [mil]
  rect 60x15 smd: 1(0,0)
  oval 60x15 smd: 2(0,-25.6) 3(0,-51.2) 4(0,-76.8) 5(170,-76.8) 6(170,-51.2) 7(170,-25.6) 8(170,0)
  silkscreen extent 25,-110 145,33
MSOP10sm [mm] "AD8351"
  rect 1.2x0.3 smd: 1(0,0)
  oval 1.2x0.3 smd: 2(0,-0.5) 3(0,-1) 4(0,-1.5) 5(0,-2.008) 6(4.75,-2.008) 7(4.75,-1.5) 8(4.75,-1) 9(4.75,-0.5) 10(4.75,0)
  silkscreen extent 0.6,-2.53 4.32,0.56
SIP2MOLEX [mil]
  rect 58x58 hole 42: 1(0,0)
  round 58 hole 42: 2(100,0)
  silkscreen extent -50,-120 150,125
SIP3MOLEX [mil]
  rect 58x58 hole 38: 1(0,0)
  round 58 hole 38: 2(100,0) 3(200,0)
  silkscreen extent -50,-120 250,125
SIP4MOLEX [mil]
  rect 58x58 hole 42: 1(0,0)
  round 58 hole 42: 2(100,0) 3(200,0) 4(300,0)
  silkscreen extent -50,-120 350,125
sma_edge [mil]
  rect 200x90 smd: 1(0,0)
  rect 200x90 all layers, no hole: 2(0,-170) 2(0,170)
sma_pcb_200 [mil]
  rect 100x100 hole 70: 0(0,0) 0(0,-200) 0(200,-200) 0(200,0)
  round 80 hole 52: 1(100,-100)
  silkscreen extent 50,-255 255,55
SMD_ETHERNET [mil] "Amphenol RJSSE-5080"
  rect 130x245 smd: 0(-181,-47.5) 0(-181,-452.5)
  round 106 hole 106: 0(0,0) 0(0,-500)
  rect 100x22 smd: 1(-514,-75) 2(-514,-125) 3(-514,-175) 4(-514,-225) 5(-514,-275) 6(-514,-325) 7(-514,-375) 8(-514,-425)
  silkscreen extent -436,-575 162,75
SOIC08 [mil]
  rect 60x20 smd: 1(0,0)
  oval 60x20 smd: 2(0,-50) 3(0,-100) 4(0,-150) 5(200,-150) 6(200,-100) 7(200,-50) 8(200,0)
  silkscreen extent 43,-175 157,25
TSOT-6 [mm]
  rect 1x0.5 smd: 1(0,0) 2(0,-0.95) 3(0,-1.9) 4(2.102,-1.9) 5(2.102,-0.95) 6(2.102,0)
  silkscreen extent 0.08,-2.67 2.02,0.98
TSSOP20 [mil]
  rect 60x12 smd: 1(0,0)
  oval 60x12 smd: 2(0,-25.59) 3(0,-51.18) 4(0,-76.77) 5(0,-102.36) 6(0,-127.95) 7(0,-153.54) 8(0,-179.13) 9(0,-204.72) 10(0,-230.31) 11(251.97,-230.31) 12(251.97,-204.72) 13(251.97,-179.13) 14(251.97,-153.54) 15(251.97,-127.95) 16(251.97,-102.36) 17(251.97,-76.77) 18(251.97,-51.18) 19(251.97,-25.59) 20(251.97,0)
  silkscreen extent 72,-243 180,13
"UKG - QFN52" [mil]
  rrect10% 212.99x253.94 hole 44: 0(139,-128)
  rect 20x10 smd: 1(0,0) 2(0,-19.68) 3(0,-39.37) 4(0,-59.05) 5(0,-78.74) 6(0,-98.43) 7(0,-118.11) 8(0,-137.8) 9(0,-157.48) 10(0,-177.16) 11(0,-196.85) 12(0,-216.53) 13(0,-236.22) 14(0,-255.9) 27(277.72,-255.9) 28(277.72,-236.22) 29(277.72,-216.53) 30(277.72,-196.85) 31(277.72,-177.16) 32(277.72,-157.48) 33(277.72,-137.8) 34(277.72,-118.11) 35(277.72,-98.43) 36(277.72,-78.74) 37(277.72,-59.05) 38(277.72,-39.37) 39(277.72,-19.68) 40(277.72,0)
  rect 10x20 smd: 15(30.59,-286.5) 16(50.28,-286.5) 17(69.96,-286.5) 18(89.65,-286.5) 19(109.33,-286.5) 20(129.02,-286.5) 21(148.7,-286.5) 22(168.39,-286.5) 23(188.07,-286.5) 24(207.76,-286.5) 25(227.44,-286.5) 26(247.13,-286.5) 41(247.13,30.59) 42(227.44,30.59) 43(207.76,30.59) 44(188.07,30.59) 45(168.39,30.59) 46(148.7,30.59) 47(129.02,30.59) 48(109.33,30.59) 49(89.65,30.59) 50(69.96,30.59) 51(50.28,30.59) 52(30.59,30.59)
  silkscreen extent -2,-285 277,33
VFCD1505 [mil] "resistor - surface mount voltage divider"
  rect 20x52 smd: 1(0,0) 2(61,0) 3(122,0)
  silkscreen extent 21,-25 101,25

## Part data
C1 C2 C3 C4 C5 C7 C8 C9 C10 C11 C12 C14 C16 C17 C19 C22 C23 C24 C25 C27 C28 C29 C33 C34 C35 C36 C37 C38 C39 C40 C41 C42 C43 C44 C45 C46 C50 C76 C77 C78 C79 C80 C81 C82 C85 C86 C87 C88 C89 C90 C91 C92 C93 C94 C96 C97 C103 C106 C107 C108 C109 C110: library part CAP_SM_1, "capacitor"
C6: library part "CAP_SM Interdigitated", "INTERDIGITATED capacitor"
C13 C15 C18 C20 C21 C26 C30 C31 C32 C49 C52 C56 C59 C61 C63 C66 C69 C71 C74 C84 C98 C100 C104: library part CAPACITOR_SM, "ELECTROLYTIC capacitor"
C47 C53 C57 C75 C101: library part CAPACITOR_SM, "capacitor"
C48 C51 C54 C55 C58 C60 C62 C64 C65 C67 C68 C70 C72 C73 C83 C95 C99 C102 C105 C111 C112 C113 C114 C115 C116 C117 C118 C119 C120 C121 C122 C123 C124 C125 C126 C127: library part CAP_SM, "capacitor"
J11 J12 J13 J14 J15 J16: "sma edge connector"
JP1 JP2 JP5 JP6 JP7 JP8: library part SMA_EDGE, "sma connector"
JP2_B: library part "BTE-040-01-F-D-A XEM6010_JP2", "Samtec Connector 0.8mm 80pin"
JP3: "4 pin molex connector"
JP3_B: library part "BTE-040-01-F-D-A XEM6010_JP3", "Samtec Connector 0.8mm 80pin"
JP4: "2 pin molex connector"
JP9 JP10: library part SIP8, "ethernet connector"
JP17 JP18 JP19: "3 pin molex connector"
JP20: "14 pin 2mm IDC connector"
L1 L2 L3 L4 L5 L6 L7 L8 L9 L10 L11 L12 L13 L14 L15 L16 L17 L18 L19 L20 L21 L22 L23 L24 L25 L26 L27 L28: library part INDUCTOR_SM, "inductor"
R1 R2 R3 R4 R5 R6 R7 R8 R9 R10 R11 R12 R13 R14 R15 R16 R17 R18 R19 R20 R21 R22 R23 R24 R25 R26 R27 R28 R29 R30 R31 R32 R33 R34 R35 R36 R37 R38 R39 R40 R41 R42 R43 R44 R45 R46 R48 R49 R50 R51 R52 R53 R54 R55 R56 R57 R58 R59 R60 R61 R62 R63 R64 R65 R66 R67 R68 R69 R70 R71: library part RES_SM, "resistor"
R47: library part "res_div VFCD1505", "resistor network"
U1: "16 bit, low power, dual ADC"
U2: "Programmable Gain Instumentation Amp"
U3 U5: library part AD8139, "Differential ADC Driver"
U4 U13 U14: "IC AMP INST ICMOS LDRIFT 10MSOP"
U6: library part ADR12x, "Voltage Reference"
U7: library part ADR42x, "Ultra Precision Low Noise XFET Voltage Reference"
U8: "ultraprecision dual rail-to-rail op amp"
U9 U19: "ultraprecision  rail-to-rail op amp"
U10: "DAC 20BIT SRL 20TSSOP"
U11: "80 V op amp"
U12: "DAC LVDS DUAL16BIT 500MSPS"
U15 U16 U17 U18 U20: "regulator"

## Free pads (board coordinates)
  round 125 hole 125: 0(118.11,1799.11) 0(118.11,3531.39) 0(2834.65,1799.11) 0(2834.65,3531.39)
  round 120 hole 120: 0(160,585) 0(160,5285) 0(2795,585) 0(2795,5285)
  rect 300x300 smd far side: 0(314,3967)
  rect 81x81 smd far side: 0(1724.56,797.85) 0(2195.65,797.85)
  rect 185.04x185.04 smd: 0(2053,4021.81)
  rect 185.04x185.04 smd far side: 0(2053,4021.81)
  rrect10% 253.94x212.99 on Top Paste: 1(1961,1323)
  rrect10% 253.94x212.99 on Bottom Paste: 1(1961,1323)

## Via types
v1: diameter 28, hole 12, Top Layer to Bottom Layer, 291 vias
v2: diameter 28, hole 15, Top Layer to Bottom Layer, 214 vias
v3: diameter 26, hole 12, Top Layer to Bottom Layer, 64 vias
v4: diameter 38, hole 15, Top Layer to Bottom Layer, 26 vias
v5: diameter 35, hole 15, Top Layer to Bottom Layer, 2 vias
v6: diameter 26, hole 12, Top Layer to Bottom Layer, tented both sides, 1 vias
v7: diameter 58, hole 44, Top Layer to Bottom Layer, 1 vias

## Nets (pads, with @x,y where several pads share a name; then routed paths per layer and width w, separated by ;. In a path a pad name is that pad's centre, name@x,y a point inside that pad or via, vN(x,y) a via of type N, cw(c..) or ccw(c..) an arc to the next point about the centre after c; other vN are vias at no path point)
3.3VDD: JP2_B.2 JP2_B.4 JP2_B.6 JP3_B.9 JP3_B.11 JP3_B.13 JP20.2 | length 939.9
  Top Layer w6: v1(1325,1702) 1326,1703 JP2_B.2@1326,1756 ; JP3_B.9@1452,3574 v1(1452,3634)
  Top Layer w8: JP20.2@797.32,1310 807.32,1320 1050,1320 1160,1430 1160,1600 v1(1150,1610)
  Bottom Layer w8: v1(1150,1610) 1260,1610 1325,1675 v1(1325,1702)
+: C6.2 C6.4 C6.6 C8.1 U1.8 | length 220.8
  Top Layer w9: C6.2@1950,1081 1950,1094.59 1961.41,1106 1969.68,1106 ; C6.6@1969.68,1132.18 1969.68,1106 ; C6.6@1970.42,1133.97 U1.8@1970.42,1183.73 ; C8.1@1990.83,1014.74 1990.83,1093.13 1977.96,1106 1969.68,1106
  Top Layer w10: C6.6@1969.69,1132.18 ccw(c1967.9,1133.97) C6.6@1970.42,1133.97
+1.2VDD: JP3_B.4 JP3_B.6 | length 57
  Top Layer w6: v1(1353,3275) v1@1355.5,3277.5 ; v1@1357.5,3277.5 JP3_B.4@1357.5,3331
+5: C59.1 C87.1 C90.1 C93.1 C94.2 L8.2 R52.2 R53.2 U3.3 U5.3 U6.3 | length 679.7
  Top Layer w10: R52.2@1419.45,713.86 R52.2@1418.45,713.86 1429.59,725 1480,725 1480,686.41 R53.2@1463.45,669.86 ; v1(1500,1020) 1500,1032.2 C93.1@1512.73,1044.93 1572.89,1105.09 U6.3@1572.89,1151.11 ; C87.1@1562.98,818 v3(1596,818) ; C90.1@2032.2,818 v3(2062,818)
  Bottom Layer w10: v3@1591,818 1598.8,810.2 U3.3@1639,810.2 ; v3(2062,818) 2069.8,810.2 U5.3@2110,810.2
  Bottom Layer w20: L8.2@1139,854 C59.1@1274,854
  Bottom Layer w30: C59.1@1274,854 v4(1274,943)
  other v1: 1474,719
+5IN: JP3.1 L1.1 L3.1 L5.1 L7.1 L19.1 L23.1 | length 534
  Bottom Layer w30: L23.1@110,2960 v4(110,3049) ; v4(411,1605) L1.1@500,1605 ; v4(895,854) L7.1@984,854 ; v4(1212,2415.2) L19.1@1301,2415.2 ; v4(1331,2970) L5.1@1420,2970 ; v4(2038,2973.2) L3.1@2127,2973.2
+12: C13.1 C14.1 C16.2 C20.1 C23.1 C31.1 C34.1 C42.2 C45.2 C61.1 C89.1 C92.1 C96.1 C98.1 L10.2 L26.2 U2.8 U4.8 U7.2 U8.8 U9.7 U10.5 U13.8 U14.8 U19.7 | length 1754.4
  Top Layer w9: v1(860,4490) 861.1,4491.1 U9.7@918.05,4491.1 ; v1(870,3725) v1@872.89,3727.89 ; v1(870,4205) 885,4205 ; U8.8@915,4213.89 U8.8@918.05,4216.94 896.94,4216.94 885,4205 ; v1@947,4042 937.61,4051.39 U10.5@937.61,4125.69 937.61,4162.39 895,4205 885,4205 ; U7.2@1402,4332 1443.8,4332 C16.2@1478,4366.2 ; U14.8@1757.53,4379.48 v1(1788.25,4410.2) ; v2(2316.22,4412.31) 2321.04,4417.13 C42.2@2321.04,4449.04
  Top Layer w12: v1@872.89,3727.89 U19.7@918.05,3727.89 ; C16.2@1478,4366.2 C16.2@1478,4378
  Bottom Layer w9: C20.1@937,3973 C20.1@947,3983 ; v1@947,4042 C23.1@947,4063 ; C45.2@1776.04,4445.04 1788.25,4432.82 v1(1788.25,4410.2) ; U2.8@1806,515.37 1873.29,515.37 C89.1@1904.93,483.73 1880,458.8 v1(1880,455) ; v2@2314.42,4413.05 cw(c2314.42,4410.51) v2(2316.22,4412.31) ; v2(2316.22,4412.31) U13.8@2346.94,4381.59 ; U4.8@2378,515.37 2434.63,515.37 2450,500 2469.66,500 C92.1@2479.93,489.73 ; v1(2465,460) 2465,463.8 C92.1@2489.93,488.73
  Bottom Layer w12: C13.1@798,4411 820,4433 820,4450 v1(860,4490) 860,4515 C14.1@870,4525 ; v1(870,3725) C34.1@890,3725 ; v1(870,4205) 886.9,4221.9 C96.1@886.9,4256.49 ; v1(920,3660) 964,3660 C31.1@974,3650 ; C20.1@947,3983 v1(947,4036)
  Bottom Layer w20: L26.2@252,2531.9 C98.1@387,2531.9 ; C98.1@382,2536.1 v4(382,2631.1) ; L10.2@481,453 C61.1@616,453
  Bottom Layer w30: C61.1@616,453 v4(705,453)
  other v1: 1450,4338.2
+12IN: JP3.2 L9.1 L25.1 | length 163.5
  Bottom Layer w30: L25.1@97,2536.1 v4(97,2625.1) ; v4(274,400) 274,401 L9.1@326,453
+68: C26.1 C27.1 JP4.1 U11.5 | length 352.7
  Top Layer w20: U11.5@264.51,4417.1 264.51,4330.49 v5@290,4305
  Bottom Layer w20: C27.1@238,4302 v5(290,4302) C26.1@468,4302
+VDC: JP3_B.1 JP3_B.3 JP3_B.5 | length 60
  Top Layer w6: JP3_B.3@1357.5,3574 v1(1357.5,3634)
-: C4.1 C6.1 C6.3 C6.7 U1.7 | length 239.6
  Top Layer w10: C4.1@1930.31,1014.74 1930.31,1051 ; C6.7@1950,1132.18 ccw(c1948.21,1133.97) C6.7@1950.74,1133.97 ; U1.7@1950.74,1183.73 C6.7@1950.74,1133.97 ; C6.3@1969.68,1081 1969.68,1067.41 1953.27,1051 1930.31,1051 ; 1930.31,1051 1930.31,1081 1930.31,1099.69 1940,1109.37 1940.78,1109.37 1950.74,1119.33 C6.7@1950.74,1133.97
-12: C18.2 C19.1 C28.1 C30.2 C32.2 C33.1 C41.2 C44.2 C63.2 C88.1 C91.1 C97.1 C104.2 C127.1 L12.2 L28.2 pad.0@314,3967 U2.3 U4.3 U8.4 U9.4 U10.18 U11.4 U13.3 U14.3 U19.4 | length 2342.1
  Top Layer w9: U14.3@1889.16,4510.84 v2@1919.88,4541.56 ; v2@2183.12,4543.56 2230.64,4496.04 C41.2@2275.04,4496.04
  Top Layer w12: U10.18@988.8,3873.72 988.8,3836.2 v1(1015,3810) ; U19.4@1088.05,3779.09 1088.05,3803.05 v1(1105,3820) ; U8.4@1088.05,4293.74 1108.74,4293.74 v1(1130,4315) ; U9.4@1088.05,4542.3 1100,4554.25 v1(1100,4575)
  Top Layer w20: U11.4@314.51,3972.1 330,3987.59 330,4320 314.51,4335.49 U11.4@314.51,4417.1
  Top Layer w28: 490,3700 v4(780,3410)
  Bottom Layer w9: C32.2@1199,3815 C32.2@1223,3839 ; C44.2@1902.04,4582.04 1923.88,4560.19 v2(1923.88,4539.56) ; v2@1919.88,4541.56 ccw(c1918.08,4543.36) v2@1920.63,4543.36 ; v2@2182.37,4545.36 ccw(c2184.92,4545.36) v2@2183.11,4543.57 ; v2@2183.12,4543.56 U13.3@2213.84,4512.84
  Bottom Layer w10: v1(1155,4455) C18.2@1175,4422
  Bottom Layer w12: v1(1015,3810) C30.2@1015,3856 ; C19.1@1064,4595 1080,4595 v1(1100,4575) ; C97.1@1102.39,4315 v1(1130,4315) ; v1(1105,3820) 1120,3820 1137,3803 1149,3815 C32.2@1199,3815 ; C88.1@1525.07,507.27 1541.37,523.57 1571.19,523.57 ccw(c1590.89,543.27) 1590.89,515.41 U2.3@1619.33,515.41 ; C91.1@2104.49,523.85 v2(2143.79,523.85) ccw(c2163.49,543.54) 2163.49,515.69 U4.3@2191.93,515.69
  Bottom Layer w15: C18.2@1175,4422 C18.2@1186,4411
  Bottom Layer w20: C127.1@290,4520 290,4505 v5(315,4480) ; L28.2@752,2535.51 C104.2@887,2535.51 ; C104.2@882,2536.1 v4(882,2631.1) ; L12.2@1052,454 C63.2@1187,454
  Bottom Layer w30: C63.2@1187,454 v4(1276,454)
  other v2: 1570.19,521.57 50,3635 100,3635 150,3635 200,3635 250,3635 300,3635 350,3635 400,3635 450,3635 500,3635 550,3635 50,3685 100,3685 150,3685 200,3685 250,3685 300,3685 350,3685 400,3685 450,3685 500,3685 550,3685 50,3735 100,3735 150,3735 200,3735 250,3735 300,3735 350,3735 400,3735 450,3735 500,3735 550,3735 50,3785 100,3785 150,3785 200,3785 250,3785 300,3785 350,3785 400,3785 450,3785 500,3785 550,3785 50,3835 100,3835 150,3835 200,3835 250,3835 300,3835 350,3835 400,3835 450,3835 500,3835 550,3835 50,3885 100,3885 150,3885 200,3885 250,3885 300,3885 350,3885 400,3885 450,3885 500,3885 550,3885 50,3935 100,3935 150,3935 200,3935 250,3935 300,3935 350,3935 400,3935 450,3935 500,3935 550,3935 50,3985 100,3985 150,3985 200,3985 250,3985 300,3985 350,3985 400,3985 450,3985 500,3985 550,3985 50,4035 100,4035 150,4035 200,4035 250,4035 300,4035 350,4035 400,4035 450,4035 500,4035 550,4035 50,4085 100,4085 150,4085 200,4085 250,4085 300,4085 350,4085 400,4085 450,4085 500,4085 550,4085 2181.12,4542.56
-12IN: JP3.4 L11.1 L27.1 | length 2246
  Bottom Layer w30: JP3.4@288.9,797.51 159,797.51 159,1544 498,1883 498,2468 566.1,2536.1 L27.1@597,2536.1 v4(597,2625.1) ; v4(824,455) L11.1@913,455
A0_IN: JP2_B.17 R53.1 U2.5 U4.5 | length 2720
  Top Layer w6: R53.1@1417.49,623.9 1460.39,581 v1(1465.71,581) 1496,581 1531,616 2105,616 v3(2120,601) ; JP2_B.17@1578.72,1999.31 v3@1578.72,2070.72
  Bottom Layer w6: 1367,640.2 1373.6,633.6 ; v3(1574,2071) 1574,2000.8 1363.5,1790.3 1363.5,643.7 1373.6,633.6 ; U2.5@1619,555.06 1591.56,555.06 1587.27,559.34 1587.27,559.44 1565.71,581 v1(1465.71,581) 1426.2,581 1373.6,633.6 ; v3(2120,601) 2120,599.86 2164.49,555.37 U4.5@2191.93,555.37
A0_OUT: JP2_B.47 R51.1 U13.5 U14.5 | length 3660.6
  Top Layer w6: U14.5@1861.1,4538.9 1943.2,4621 v1(2016,4621) ; JP2_B.47@2050.5,1999 2050.5,2030.5 2071,2051 2071,2328.8 2291.2,2549 2430.25,2549 2629.13,2747.87 v1(2629.13,2751.75)
  Bottom Layer w6: v1(2016,4621) 2161.8,4621 2272.8,4510 2372.25,4510 2675,4207.26 2746,4136.26 2746,3392.8 2713,3359.8 2713,2835.63 v1(2629.13,2751.75) ; 2616.1,4268.36 R51.1@2616.1,4302.51
A1_IN: JP2_B.15 R52.1 U2.4 U4.4 | length 2835.4
  Top Layer w6: R52.1@1372.49,667.9 1372.49,619.51 1440.97,551.03 v1(1502,551.03) 1552.97,602 2057,602 v3(2093,566) ; JP2_B.15@1547.22,1999.31 v3@1547.22,2067.78
  Bottom Layer w6: v3(1539,2071) 1539,1985.6 1351.5,1798.1 1351.5,635.9 1436.37,551.03 v1(1502,551.03) 1575.89,551.03 1591.86,535.06 U2.4@1619,535.06 ; v3(2093,566) 2134.16,566 2164.79,535.37 U4.4@2191.93,535.37
A1_N: C1.2 R4.2 U1.4 | length 284.2
  Top Layer w6: R4.2@1776.99,1009.96 1776.99,1038.02 1884,1145.03 1884,1166 1891.68,1173.69 U1.4@1891.68,1183.73
  Top Layer w10: R4.2@1786.2,1000.75 C1.2@1849.15,1000.75
A1_OUT: JP2_B.37 R50.1 U13.4 U14.4 | length 3691.9
  Top Layer w6: U14.4@1875.24,4525.57 1939.67,4590 v1(1985,4590) ; JP2_B.37@1893,1999 1893,2030 1878.3,2044.7 1878.3,2085.78 2053,2260.47 2053,2338 2285,2570 2428.63,2570 2606.13,2747.5 2606.13,2761.28 2630.74,2785.89 v1(2630.74,2788.5)
  Top Layer w9: U14.4@1875.24,4524.76 U14.4@1875.24,4525.57
  Bottom Layer w6: v1(1985,4590) 2166.21,4590 2190.64,4565.56 2227.76,4528.45 U13.4@2227.76,4526.76 2256.52,4498 2361.63,4498 2732,4127.63 2732,3398.6 2699,3365.6 2699,2850.37 2637.12,2788.5 v1(2630.74,2788.5) ; R50.1@2563.9,4252.49 2602.86,4252.49
A1_P: C2.1 R8.2 U1.3 | length 306.6
  Top Layer w6: R8.2@1722.75,1000.75 1872,1150 U1.3@1872,1183.73
  Top Layer w10: C2.1@1657.48,999.75 R8.2@1719.24,999.75
A2_N: C9.2 R14.2 U1.12 | length 309.4
  Top Layer w6: U1.12@2049.16,1183.73 2049.16,1149.84 R14.2@2198.25,1000.75
  Top Layer w10: R14.2@2203,1000.75 C9.2@2267.61,1000.75
A2_P: C10.1 R18.2 U1.11 | length 287.9
  Top Layer w6: U1.11@2029.48,1183.73 2029.48,1174.69 2037.16,1167 2037.16,1144.86 2145,1037.03 R18.2@2145,1008.84
  Top Layer w10: C10.1@2071.73,1000.75 R18.2@2136.91,1000.75
ADC_CS: JP2_B.45 U1.19 | length 1128.3
  Top Layer w6: v3(1967,2076.66) 2019,2024.66 JP2_B.45@2019,1999 ; U1.19@2119.5,1293.33 2119.83,1293 2159.11,1293 2171.11,1305 v3(2190,1305)
  Bottom Layer w6: v3(1967,2076.66) 1955,2064.66 1955,1863 2286,1532 2286,1407.06 2190,1311.06 v3(2190,1305)
ADC_SCK: JP2_B.43 U1.20 | length 1093.8
  Top Layer w6: v3(1933.65,2076.66) 1987.5,2022.82 JP2_B.43@1987.5,1999 ; U1.20@2121.48,1315 v3(2150,1315)
  Bottom Layer w6: v3(1933.65,2076.66) 1943,2067.32 1943,1858.03 2274,1527.03 2274,1413 2194,1333 v3(2150,1315)
ADC_SDI: JP2_B.41 U1.21 | length 1087.6
  Top Layer w6: v3@1900.3,2074.7 1956,2019 JP2_B.41@1956,1999 ; U1.21@2119.5,1332.7 2130.7,1332.7 2145,1347 v3(2168,1347)
  Bottom Layer w6: v3@1900.3,2074.2 v3(1900.3,2076.66) 1931,2045.97 1931,1853.06 2262,1522.06 2262,1417.97 2191.03,1347 v3(2168,1347)
ADC_SDO: JP2_B.16 U1.46 | length 567
  Top Layer w6: JP2_B.16@1547.22,1756.31 1547.22,1525.78 1739,1334 1800.47,1334 1802.04,1332.43 U1.46@1802.04,1334